# Altium PCB CD2840ADX-V21.PcbDoc (part 1 of 2)
Units mil, origin at the board's own origin, x right, y up, seen from the top; angles counter-clockwise.
Board outline 1576.8 x 1102.34 mil, 2 copper layers (Top Layer, Bottom Layer), stack 39.414 mil thick; 59 components, 48 nets, 199 pads, 466 vias.
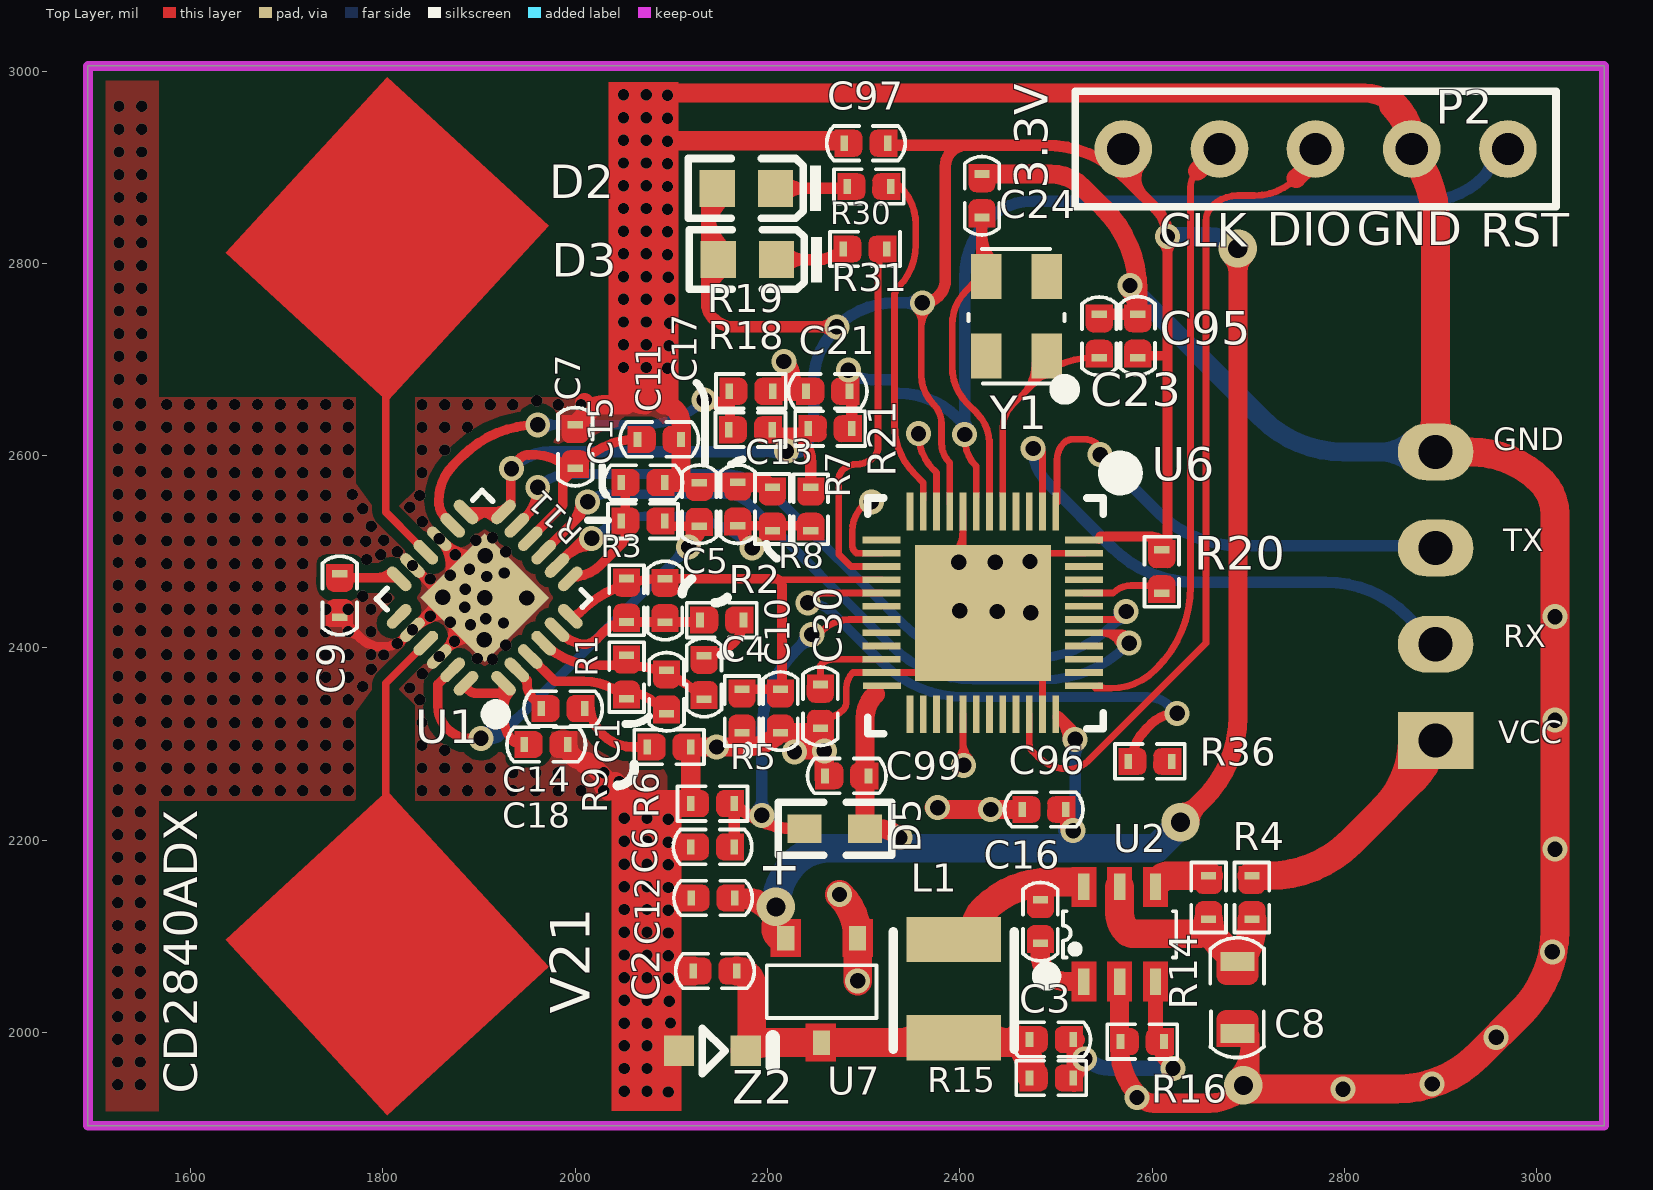
[diagram p0: Top Layer view]
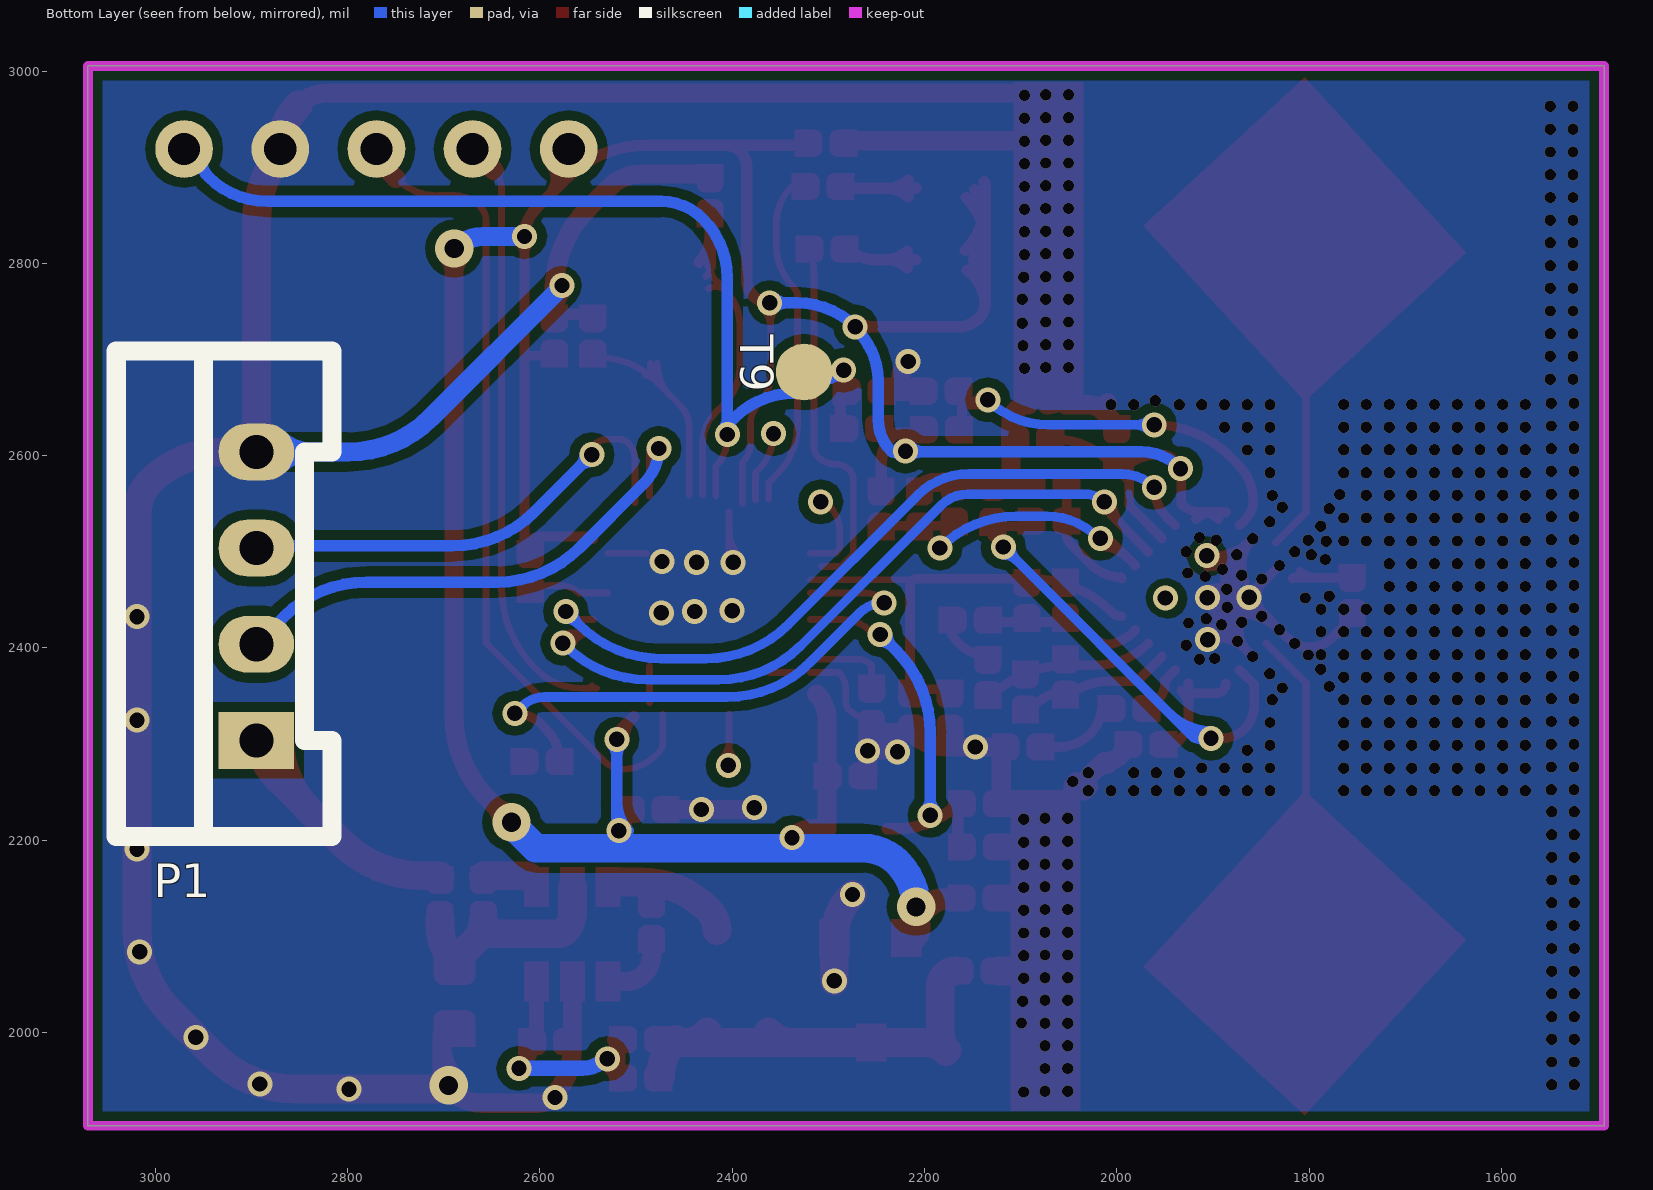
[diagram p1: Bottom Layer view, seen from below]

## Layer stack, top to bottom
Top Layer: signal copper 1.4
Dielectric: core 36.6142, FR-4, Dk 4.8
Bottom Layer: signal copper 1.4

## Board outline
1493.2,3005.34 3070,3005.34 3070,1903 1493.2,1903 1493.2,3005.34

## Design rules (kind name [scope] priority, off if disabled: settings)
Clearance [All] p1: gap=6
ComponentClearance [All] p1: gap=10 collisioncheckmode=3 verticalgap=10
PolygonConnect [All] p1: connectstyle=Direct reliefconductorwidth=10 reliefentries=4 polygonreliefangle="90 Angle"
RoutingVias [All] p1: holewidth=28 width=50 viastyle="Through Hole" minholewidth=15 minwidth=24 maxholewidth=28 maxwidth=50
SolderMaskExpansion [All] p1: expansion=4
TestPointUsage [All] p1: valid=0 allowmultiple=FALSE
Testpoint [All] p1: side=3 testpointundercomponent=TRUE minsize=40 maxsize=100 preferedsize=60 minholesize=0 maxholesize=40 preferedholesize=32 testpointgrid=1 style=297 order=0123456789
Width [All] p1: maxlimit=30 minlimit=7 preferedwidth=10
18 further rules are at their usual default settings.

## Components (designator, comment, footprint, x,y, rotation, side; value= is the part's Value field where it differs from the comment)
C1 "5nF/NA-FSK" C0402#1 2095,2377 r270 top (schematic designator C16)
C2 "10uF" C0402#1 2168,2064 r180 top (schematic designator C16)
C3 "22pF" C0402#1 2517.75,1992.75 r180 top (schematic designator C16)
C4 "10uF" C0402#1 2134,2392 r270 top (schematic designator C16)
C5 "5nF/NA-FSK" C0402#1 2093.39,2472 r270 top (schematic designator C16)
C6 "0.1uF" C0402#1 2165.47,2193.1 r180 top (schematic designator C16)
C7 "100nF" C0402#1 2000,2632 r270 top (schematic designator C16)
C8 "10uF/16V" C0603 2688.75,2073.05 r270 top
C9 "10uF" C0402#1 1755,2432 r90 top (schematic designator C16)
C10 "0.1uF/NA-FSK" C0402#1 2213.39,2357 r270 top
C11 "10uF" C0402#1 2110,2617 r180 top (schematic designator C16)
C12 "10uF" C0402#1 2166,2140 r180 top (schematic designator C16)
C13 "10uF" C0402#1 2169,2527 r90 top (schematic designator C16)
C14 "10uF" C0402#1 2010,2337 r180 top (schematic designator C16)
C15 "10uF" C0402#1 2048,2572 r0 top (schematic designator C16)
C16 "0.1uF" C0402#1 2483.75,2138.05 r270 top
C17 "10uF" C0402#1 2129,2572 r270 top (schematic designator C16)
C18 "10uF/NA-FSK" C0402#1 1992.39,2299.61 r180 top (schematic designator C16)
C21 "100nF" C0402#2 2240,2667 r0 top
C23 "12pF" C0402#2 2545,2747 r270 top
C24 "12pF" C0402#2 2423,2893 r270 top
C30 "100nF" C0402#2 2255,2362 r270 top
C95 "10uF/6.3V" C0402#2 2585,2702 r90 top
C96 "0.1uF/50V" C0402#2 2510,2232 r180 top
C97 "0.1uF/50V" C0402#2 2325,2925 r180 top
C99 "0.1uF/50V" C0402#2 2305,2267 r180 top
D2 "红灯" LC-0603_LED_S1 2178,2878 r180 top
D3 "绿灯" LC-0603_LED_S1 2179,2804 r180 top
D5 "PT19-21C" LED-0603 2270,2212 r0 top
L1 "PRS3015-100MT" PRS3015 2393.75,2100.75 r270 top
P1 "SWD" XH2.54mm 2894.85,2301.42 r270 bottom locked
P2 "DIP1X5-2.54" DIP1X5-2.54 2570,2919 r0 top
R1 "750k" R0402#1 2053.39,2347 r90 top (schematic designator R14)
R2 "20k" R0402#1 2175,2429 r180 top (schematic designator R14)
R3 "100K-NA" R0402#1 2053.39,2427 r90 top (schematic designator R14)
R4 "5.6" R0402#1 2703.75,2163.05 r270 top (schematic designator R14)
R5 "47k/NA-FSK" R0402#1 2173.39,2357 r270 top (schematic designator R14)
R6 "47k" R0402#1 2165.47,2238.1 r180 top (schematic designator R14)
R7 "12K" R0402#1 2245,2567 r270 top (schematic designator R14)
R8 "10k" R0402#1 2205,2522 r90 top (schematic designator R14)
R9 "18K" R0402#1 2075,2297 r0 top (schematic designator R14)
R11 "10k/NA-FSK" R0402#1 2093,2532 r180 top (schematic designator R14)
R14 "47k" R0402#1 2658.75,2163.05 r270 top
R15 "25.5k" R0402#1 2517.75,1952.75 r180 top
R16 "5.1k" R0402#1 2567.09,1990.55 r0 top
R18 "10k/NA-FSK" R0402#1 2205,2627 r180 top (schematic designator R14)
R19 "10k/NA-FSK" R0402#1 2160,2667 r0 top (schematic designator R14)
R20 "4.7K" R0402#2 2610,2502 r270 top
R21 "4.7KΩ" R0402#2 2287.8,2628.14 r180 top
R30 "1KΩ" R0402#2 2328,2880 r180 top
R31 "1KΩ" R0402#2 2324,2815 r180 top
R36 "100R" R0402#2 2575,2282 r0 top
T9 "" TestPoints 2330,2692 r270 bottom
U1 "XBR8161" QFN24 1855.75,2513.6 r135 top (schematic designator QFN-1)
U2 "SY8120B1ABC" SOT-23-6 2528.75,2053.05 r90 top
U6 "HC32F460JEUA-QFN48TR" QFN48-5X5mm 2424,2541 r270 top
U7 "ME6216A33M3G" SOT-23-L 2293.75,2098.05 r270 top (schematic designator U6)
Y1 "8MHZ-1C208000CE0R" OSC-SMD_3225 2459,2745 r90 top
Z2 "ESD5Z5.0T1G" SOD323 2189,1981 r180 top

## Footprints (in the part's own frame and the unit in brackets; to place one, negate y for a bottom-side part, rotate by r counter-clockwise, add the part's x,y. Pads: shape width x height; smd on the part's side, far side on the other; paste and mask are expansions set on the pad)
C0402#1 [mm]
  rect 0.2x0.4 smd: 1(0,0) 2(1.15,0)
  Top Layer region: 0.873,0.352 0.873,-0.351 1.401,-0.351 1.401,0.352
  Top Layer region: 1.402,-0.352 1.402,0.351 0.874,0.351 0.797,0.336 0.732,0.292 0.689,0.227 0.673,0.151 0.673,0.151 0.673,-0.152 0.689,-0.228 0.732,-0.293 0.797,-0.337 0.874,-0.352 0.874,-0.352
  Top Layer region: -0.252,0.352 -0.252,-0.351 0.276,-0.351 0.353,-0.336 0.418,-0.292 0.461,-0.227 0.477,-0.151 0.477,-0.151 0.477,0.152 0.461,0.228 0.418,0.293 0.353,0.337 0.276,0.352 0.276,0.352
  silkscreen extent -0.46,-0.46 1.61,0.46, body extent 0.08,-0.3 1.08,0.3, height 0.2
C0402#2 [mm]
  rect 0.2x0.4 smd: 1(0,0) 2(1.15,0)
  Top Layer region: 1.402,-0.352 1.402,0.351 0.874,0.355 0.796,0.34 0.729,0.295 0.685,0.229 0.669,0.151 0.673,0.151 0.669,-0.152 0.685,-0.23 0.729,-0.296 0.796,-0.34 0.874,-0.356 0.874,-0.352
  Top Layer region: -0.252,0.352 -0.252,-0.351 0.276,-0.355 0.354,-0.34 0.421,-0.295 0.465,-0.229 0.481,-0.151 0.477,-0.151 0.481,0.152 0.465,0.23 0.421,0.296 0.354,0.34 0.276,0.356 0.276,0.352
  silkscreen extent -0.46,-0.46 1.61,0.46, body extent 0.08,-0.3 1.08,0.3, height 0.2
C0603 [mil]
  rect 19.8x35.55 smd mask+0: 1(-0.92,0) 2(74,0)
  Top Layer region: 13.34,-21.73 14.89,-21.61 16.39,-21.25 17.82,-20.66 19.14,-19.85 20.32,-18.84 21.33,-17.66 22.14,-16.34 22.73,-14.91 23.09,-13.4 23.21,-11.86 23.18,-11.86 23.21,11.88 23.09,13.43 22.73,14.93 22.14,16.36 21.33,17.68 20.32,18.86 19.14,19.87 17.82,20.68 16.39,21.27 14.89,21.63 13.34,21.75 13.34,21.72 -14.73,21.72 -14.73,-21.7
  Top Layer region: 59.72,-21.73 58.17,-21.61 56.67,-21.25 55.24,-20.66 53.92,-19.85 52.74,-18.84 51.73,-17.66 50.92,-16.34 50.33,-14.91 49.97,-13.4 49.85,-11.86 49.88,-11.86 49.85,11.88 49.97,13.43 50.33,14.93 50.92,16.36 51.73,17.68 52.74,18.86 53.92,19.87 55.24,20.68 56.67,21.27 58.17,21.63 59.72,21.75 59.72,21.72 87.79,21.72 87.79,-21.7
  silkscreen extent -25,-28 99,28, body extent 6,-15 68,16, height 12
DIP1X5-2.54 [mil]
  round 60 hole 33.46: 1(0,0) 2(100,0) 3(200,0) 4(300,0) 5(400,0)
  silkscreen extent -50,-60 450,60
LC-0603_LED_S1 [mm]
  rect 0.93x0.98 smd: A(0.77,0) K(-0.77,0)
  silkscreen extent -1.97,-0.79 1.54,0.79, body extent -0.8,-0.4 0.8,0.4, height 0.6
LED-0603 [mm]
  rect 0.9x0.762 smd: 1(-0.8,0) 2(0.8,0)
  silkscreen extent -1.5,-0.7 1.5,0.7
OSC-SMD_3225 [mm] "OSC-SMD-3225"
  rect 1.2x0.8 smd: 1(-1.05,-0.8) 2(1.05,-0.8) 3(1.05,0.8) 4(-1.05,0.8)
  silkscreen extent -1.98,-1.37 1.78,1.27
PRS3015 [mm]
  rect 1.2x2.5 smd: 1(0.1,0) 2(2.7,0)
  silkscreen extent -0.1,-1.6 3,1.6, body extent -0.1,-1.5 2.9,1.5, height 1.5
QFN24 [mm]
  oval 0.8x0.3 smd: 1(-3.95,1.45) 2(-3.95,0.95) 3(-3.95,0.45) 4(-3.95,-0.05) 5(-3.95,-0.55) 6(-3.95,-1.05) 13(-0.05,-1.05) 14(-0.05,-0.55) 15(-0.05,-0.05) 16(-0.05,0.45) 17(-0.05,0.95) 18(-0.05,1.45)
  oval 0.3x0.8 smd: 7(-3.25,-1.75) 8(-2.75,-1.75) 9(-2.25,-1.75) 10(-1.75,-1.75) 11(-1.25,-1.75) 12(-0.75,-1.75) 19(-0.75,2.15) 20(-1.25,2.15) 21(-1.75,2.15) 22(-2.25,2.15) 23(-2.75,2.15) 24(-3.25,2.15)
  rect 2.4x2.4 smd: 25(-2,0.2)
  silkscreen extent -4.59,-1.75 0.05,2.37
QFN48-5X5mm [mm] "QFN48-5X5mm"
  rect 1x0.18 smd: 1(-0.02,1.925) 2(-0.02,1.575) 3(-0.02,1.225) 4(-0.02,0.875) 5(-0.02,0.525) 6(-0.02,0.175) 7(-0.02,-0.175) 8(-0.02,-0.525) 9(-0.02,-0.875) 10(-0.02,-1.225) 11(-0.02,-1.575) 12(-0.02,-1.925) 25(5.33,-1.925) 26(5.33,-1.575) 27(5.33,-1.225) 28(5.33,-0.875) 29(5.33,-0.525) 30(5.33,-0.175) 31(5.33,0.175) 32(5.33,0.525) 33(5.33,0.875) 34(5.33,1.225) 35(5.33,1.575) 36(5.33,1.925)
  rect 0.18x1 smd: 13(0.73,-2.675) 14(1.08,-2.675) 15(1.43,-2.675) 16(1.78,-2.675) 17(2.13,-2.675) 18(2.48,-2.675) 19(2.83,-2.675) 20(3.18,-2.675) 21(3.53,-2.675) 22(3.88,-2.675) 23(4.23,-2.675) 24(4.58,-2.667) 37(4.58,2.675) 38(4.23,2.675) 39(3.88,2.675) 40(3.53,2.675) 41(3.18,2.675) 42(2.83,2.675) 43(2.48,2.675) 44(2.13,2.675) 45(1.78,2.675) 46(1.43,2.675) 47(1.08,2.675) 48(0.73,2.675)
  rect 3.6x3.6 smd: 49(2.655,0)
  silkscreen extent -1.07,-3.05 5.84,3.7
R0402#1 [mm]
  rect 0.2x0.4 smd: 1(0,0) 2(1.15,0)
  Top Layer region: 0.873,0.352 0.873,-0.351 1.401,-0.351 1.401,0.352
  Top Layer region: 1.402,-0.352 1.402,0.351 0.874,0.351 0.797,0.336 0.732,0.292 0.689,0.227 0.673,0.151 0.673,0.151 0.673,-0.152 0.689,-0.228 0.732,-0.293 0.797,-0.337 0.874,-0.352 0.874,-0.352
  Top Layer region: -0.252,0.352 -0.252,-0.351 0.276,-0.351 0.353,-0.336 0.418,-0.292 0.461,-0.227 0.477,-0.151 0.477,-0.151 0.477,0.152 0.461,0.228 0.418,0.293 0.353,0.337 0.276,0.352 0.276,0.352
  silkscreen extent -0.35,-0.46 1.5,0.46, body extent 0.12,-0.26 1.12,0.24, height 0.35
R0402#2 [mm]
  rect 0.2x0.4 smd: 1(0,0) 2(1.15,0)
  Top Layer region: -0.252,0.352 -0.252,-0.351 0.276,-0.355 0.354,-0.34 0.421,-0.295 0.465,-0.229 0.481,-0.151 0.477,-0.151 0.481,0.152 0.465,0.23 0.421,0.296 0.354,0.34 0.276,0.356 0.276,0.352
  Top Layer region: 1.402,-0.352 1.402,0.351 0.874,0.355 0.796,0.34 0.729,0.295 0.685,0.229 0.669,0.151 0.673,0.151 0.669,-0.152 0.685,-0.23 0.729,-0.296 0.796,-0.34 0.874,-0.356 0.874,-0.352
  silkscreen extent -0.35,-0.46 1.5,0.46, body extent 0.12,-0.26 1.12,0.24, height 0.35
SOD323 [mm]
  rect 0.8x0.8 smd: A(2.06,0) K(0.3,0)
  silkscreen extent 0.84,-0.6 1.44,0.6, body extent -0.17,-0.62 2.53,0.63, height 1.1
SOT-23-6 [mm]
  rect 0.7x0.3 smd: 1(0,0) 2(0,-0.95) 3(0,-1.9) 4(2.5,-1.9) 5(2.5,-0.95) 6(2.5,0)
  Top Layer region: 1.972,-2.226 3.025,-2.226 3.025,-1.573 1.972,-1.573
  Top Layer region: 1.972,-0.335 3.025,-0.335 3.025,0.318 1.972,0.318
  Top Layer region: -0.527,-2.226 0.526,-2.226 0.526,-1.573 -0.527,-1.573
  Top Layer region: -0.527,-1.276 0.526,-1.276 0.526,-0.623 -0.527,-0.623
  Top Layer region: -0.527,-0.335 0.526,-0.335 0.526,0.318 -0.527,0.318
  Top Layer region: 1.972,-1.276 3.025,-1.276 3.025,-0.623 1.972,-0.623
  silkscreen extent 0.63,-2.45 1.86,0.54, body extent -0.16,-2.39 2.64,0.51, height 1.45
SOT-23-L [mm]
  rect 0.65x0.45 smd: 1(0,0) 2(0,-1.9) 3(2.757,-0.95)
  Top Layer region: -0.507,-0.398 0.496,-0.398 0.496,0.405 -0.507,0.405
  Top Layer region: -0.507,-2.303 0.496,-2.303 0.496,-1.5 -0.507,-1.5
  Top Layer region: 2.254,-1.374 3.257,-1.374 3.257,-0.571 2.254,-0.571
  silkscreen extent 0.71,-2.4 2.11,0.5, body extent 0.17,-2.44 2.67,0.56, height 1.05
TestPoints [mil] "TestPoints"
  round 59.06 smd: 1(5,5)
XH2.54mm [mm]
  rect 1.5x2 hole 0.9: 1(-0.064,0)
  oval 1.5x2 hole 0.9: 2(-2.603,0) 3(-5.144,0) 4(-7.683,0)
  silkscreen extent -10.35,-3.7 2.48,2

## Part data
C1 C2 C3 C4 C5 C6 C7 C8 C9 C10 C11 C12 C13 C14 C15 C16 C17 C18 C30: library part Cap, "Capacitor"
C21: library part "0402 100nF (104) 10% 16V", "贴片电容"
C23 C24: library part "0402 22pF (220) 5% 50V", "贴片电容"
C95 C96 C97 C99: library part "0402 2.2nF (222) 10% 50V", "贴片电容"
D2 D3: library part "0603 红灯", "发光二极管"
D5: library part "Photo Sen", "Photosensitive Diode"
L1: library part Inductor, "Inductor"
P1: library part "Header 3", "Header, 3-Pin"
P2: library part DIP1X6-2.54mm
R1 R2 R3 R4 R5 R6 R7 R8 R9 R11 R14 R15 R16 R18 R19 R20: library part Res2, "Resistor"
R21 R36: library part "0402 4.7KΩ (4701) 1%", "贴片电阻"
R30 R31: library part "0402 1KΩ (1001) 1%", "贴片电阻"
T9: library part TestPoints, "TestPoints"
U1: library part XBR1000
U2: library part H9108
U6: library part HC32F460JETA-LQFP48
U7: library part SSP6206
Y1: library part "SMD-3225_4P  25MHZ 12PF 10PPM", "贴片晶振"
Z2: library part "D Zener", "Zener Diode"

## Via types
v1: diameter 11.81, hole 11.81, Top Layer to Bottom Layer, tented both sides, 403 vias
v2: diameter 26, hole 16, Top Layer to Bottom Layer, tented both sides, 59 vias
v3: diameter 40, hole 20, Top Layer to Bottom Layer, tented both sides, 4 vias

## Nets (pads, with @x,y where several pads share a name; then routed paths per layer and width w, separated by ;. In a path a pad name is that pad's centre, name@x,y a point inside that pad or via, vN(x,y) a via of type N, cw(c..) or ccw(c..) an arc to the next point about the centre after c; other vN are vias at no path point)
3.3V: C7.2 C11.2 C12.1 C95.1 C96.1 C97.1 C99.1 D2.A D3.A D5.2 P2.1 R7.1 R18.1 R20.1 R21.2 U1.10 U1.12 U1.13 U6.9 U6.24 U6.36 U6.48 U7.2 | length 5613.4
  Top Layer w7: v2@2360,2759 2360,2683.97 ccw(c2403.38,2683.97) 2372.71,2653.29 cw(c2352.69,2633.27) 2381,2633.27 2381,2613.09 ccw(c2410.19,2613.09) 2389.55,2592.45 U6.9@2389.55,2550 ; v2@2354.28,2752.28 cw(c2340.48,2738.48) 2360,2738.48 ; v2@2354.28,2752.28 cw(c2340.48,2738.48) 2360,2738.48 ; v2@2354.28,2752.28 cw(c2340.48,2738.48) 2360,2738.48 ; 2360,2733.65 cw(c2386.35,2733.65) v2@2367.72,2752.28 ; 2360,2733.65 cw(c2386.35,2733.65) v2@2367.72,2752.28 ; 2360,2733.65 cw(c2386.35,2733.65) v2@2367.72,2752.28
  Top Layer w10: U1.13@1886.38,2541.44 1913.75,2541.44 ccw(c1913.75,2567.25) 1932,2549 ccw(c1929.59,2551.41) 1933,2551.41 v2@1933,2575.27 ; 1951.66,2601 ccw(c1951.66,2587.34) 1942,2597 ccw(c1963.73,2575.27) v2@1933,2575.27 ; 1951.68,2600.78 cw(c1956.59,2546.89) C7.2@1994.85,2585.15 ; U1.10@1953.19,2513.6 cw(c1954.61,2513.6) 1953.61,2514.61 1985.38,2546.38 ; 1985.37,2546.37 ccw(c1981.45,2550.3) 1987,2550.3 1987,2590 ; 1987,2574 ccw(c1987,2574.67) 1987.47,2574.19 2005.92,2592.64 cw(c2064.72,2533.83) C11.2@2064.72,2617 ; U6.48@2544.43,2513.29 cw(c2550.97,2506.75) 2550.97,2516 ; 2546,2516 2600.18,2516 cw(c2600.18,2502.08) 2610,2511.94 ; R20.1@2616,2501 v2(2616,2828) ; 2616,2704 C95.1@2589.83,2704 ; v2@1933,2573.69 cw(c1952.31,2573.69) 1938.66,2587.34 ccw(c1952.31,2573.69) v2@1933,2573.69 ; v2@1933,2573.69 ccw(c1913.69,2573.69) 1927.34,2587.34 cw(c1913.69,2573.69) v2@1933,2573.69 ; v2@1933,2575.27 cw(c1948.64,2575.27) 1938.29,2587 ccw(c1948.64,2575.27) v2@1933,2575.27 ; v2@1933,2575.27 ccw(c1917.36,2575.27) 1927.71,2587 cw(c1917.36,2575.27) v2@1933,2575.27 ; 1995.09,2581.82 ccw(c1990.19,2586.72) C7.2@1997.13,2586.72 ; 1995.09,2581.82 ccw(c1990.19,2586.72) C7.2@1997.13,2586.72 ; 1995.09,2581.82 ccw(c1990.19,2586.72) C7.2@1997.13,2586.72 ; C7.2@2002.87,2586.72 cw(c2009.81,2586.72) 2004.91,2591.63 ; C7.2@2002.87,2586.72 cw(c2009.81,2586.72) 2004.91,2591.63 ; C7.2@2002.87,2586.72 cw(c2009.81,2586.72) 2004.91,2591.63 ; C95.1@2589.83,2704 ccw(c2589.83,2697.17) C95.1@2585,2702 cw(c2589.83,2697.17) C95.1@2589.83,2704 ; 2616,2808.69 cw(c2635.31,2808.69) 2621.66,2822.34 ccw(c2635.31,2808.69) 2616,2808.69 ; 2616,2808.69 ccw(c2596.69,2808.69) 2610.34,2822.34 cw(c2596.69,2808.69) 2616,2808.69 ; U1.13@1886.9,2540.91 cw(c1888.18,2539.63) 1888.18,2541.44 ccw(c1888.18,2539.63) U1.13@1886.9,2540.91 ; U1.13@1893.98,2533.84 cw(c1912.32,2515.49) 1912.32,2541.44 ccw(c1912.32,2515.49) U1.13@1893.98,2533.84 ; 1899.4,2541.44 cw(c1899.4,2515.49) 1917.75,2533.84 ccw(c1899.4,2515.49) 1899.4,2541.44
  Top Layer w12: 2136.75,2756.93 cw(c2180.37,2756.93) D3.A@2155.66,2792.87 ; 2136.75,2779.74 cw(c2164.68,2779.74) D3.A@2148.86,2802.76 ; D3.A@2136.75,2820.9 cw(c2203.8,2820.9) D2.A@2156.39,2868.31 ; 2136.75,2834.54 ccw(c2178.24,2834.54) D3.A@2148.9,2805.2 ; 2136.75,2849.88 cw(c2174.83,2849.88) D2.A@2147.9,2876.8 ; D2.A@2136.75,2863.51 ccw(c2207.21,2863.51) D3.A@2157.39,2813.69 ; D2.A@2138,2884.75 ccw(c2141.02,2881.73) 2136.75,2881.73 2136.75,2758.5 ccw(c2159.09,2758.5) 2143.29,2742.71 ccw(c2145,2744.41) 2145,2742 ccw(c2164.31,2761.31) 2164.31,2734 v2(2272,2734) ; 2200,2623.14 2234.72,2623.14 ; v2@2215.21,2610.08 ccw(c2204.11,2623.14) 2221.25,2623.14 2221.25,2608.37 cw(c2216.13,2608.37) v2@2219.75,2604.75 ; 2221.25,2618.03 ccw(c2233.03,2618.03) v2@2224.7,2609.7 ; 2232.79,2621.21 cw(c2203.32,2591.73) 2245,2591.73 R7.1@2245,2567 ; C97.1@2325,2925 ccw(c2329.83,2929.83) 2329.83,2923 2488,2923 cw(c2488,2802.29) 2573.36,2887.64 2603.98,2857.02 cw(c2574.96,2828) v2(2616,2828) ; v2(2361,2759) ccw(c2361,2783) 2385,2783 2385,2901 cw(c2407,2901) 2407,2923 ; U6.36@2502.55,2328.39 2515.8,2315.15 cw(c2505.65,2305) v2(2520,2305) ; v2@2510,2212.24 C96.1@2510,2232 ccw(c2526.74,2232) v2@2520.54,2216.45 ; P2.1@2579.23,2911.34 ccw(c2596.96,2896.62) 2580.67,2880.33 ; P2.1@2588.47,2903.67 ccw(c2607.13,2888.18) 2589.98,2871.02 ; 2255.1,2734 cw(c2255.1,2717.1) v2@2267.05,2729.05 ; 2255.1,2734 ccw(c2255.1,2750.9) v2@2267.05,2738.95 ; 2255.1,2734 cw(c2255.1,2717.1) v2@2267.05,2729.05 ; 2255.1,2734 ccw(c2255.1,2750.9) v2@2267.05,2738.95 ; 2255.1,2734 cw(c2255.1,2717.1) v2@2267.05,2729.05 ; 2255.1,2734 ccw(c2255.1,2750.9) v2@2267.05,2738.95 ; 2503.85,2327.1 cw(c2481.75,2305) 2513,2305 ccw(c2481.75,2305) 2503.85,2327.1 ; C96.1@2510,2229.14 ccw(c2537.14,2229.14) v2(2517.95,2209.95) cw(c2537.14,2229.14) C96.1@2510,2229.14
  Top Layer w20: v3@2199.44,2127.1 ccw(c2180.53,2119.69) 2180.53,2140 ; v3@2201.26,2124.12 ccw(c2166,2092.91) C12.1@2166,2140 2180.53,2140 ; v3@2202.39,2123.03 cw(c2181.03,2097.13) U7.2@2214.6,2097.13 ; v3@2204.32,2121.78 cw(c2196.16,2105.24) U7.2@2214.6,2105.24 ; U7.2@2214.6,2097.64 2214.6,2105.92 ccw(c2208.75,2105.92) 2208.75,2111.78 ccw(c2180.53,2111.78) 2180.53,2140 ; 2312,2352 ccw(c2337.36,2326.64) 2301.5,2326.64 D5.2@2301.5,2212 2315.42,2212 cw(c2315.42,2180.42) v2@2337.75,2202.75 ; v3(2629.5,2218.75) 2653.89,2243.14 ccw(c2568.54,2328.5) 2689.25,2328.5 v3@2689.25,2811.75 ; v3@2629.5,2228.75 ccw(c2629.5,2252.89) 2646.57,2235.82 ccw(c2663.64,2218.75) v3@2639.5,2218.75 ; v3@2681.93,2808.43 cw(c2664.25,2790.75) 2689.25,2790.75 ; 2689.25,2791.96 cw(c2712.54,2791.96) v3@2696.07,2808.43
  Top Layer w30: 2208.75,2107.32 ccw(c2217.36,2107.32) 2211.27,2101.23 ccw(c2218.95,2108.9) 2214.6,2098.96 ccw(c2218.95,2108.9) U7.2@2218.95,2098.05 ; v3@2208.75,2111.78 ccw(c2228.74,2111.78) 2214.6,2097.64 cw(c2228.74,2111.78) v3@2208.75,2111.78
  Bottom Layer w12: v2@1934,2587.25 cw(c1974.44,2546.81) 1974.44,2604 2234.04,2604 ; 2201.04,2604 ccw(c2201.04,2623.46) v2@2214.8,2609.7 ; 2204.66,2604 cw(c2204.66,2589.66) v2@2214.8,2599.8 ; v2@2224.89,2600 cw(c2234.03,2591.55) 2234.03,2604 ; v2@2225.62,2608.57 ccw(c2234.03,2614.04) 2234.03,2604 ; v2(2361,2759) 2332.36,2759 ccw(c2332.36,2673.64) v2(2272,2734) cw(c2267.78,2734) 2270.76,2731.01 2269.64,2729.89 ccw(c2321.28,2678.25) 2248.25,2678.25 2248.25,2638.32 cw(c2199.72,2638.32) 2234.04,2604 ; v2@2513,2214.9 ccw(c2496.1,2231.8) 2520,2231.8 ; v2@2513.88,2204.25 cw(c2505.39,2192.37) 2520,2192.37 ; 2520,2192.49 v2(2520,2305) ; 2234,2604 cw(c2234.75,2614.54) 2225.88,2608.8 ccw(c2234.75,2614.54) 2234,2604 ; 2234,2604 ccw(c2233.25,2593.46) 2225.28,2600.4 cw(c2233.25,2593.46) 2234,2604 ; 2234.04,2604 cw(c2234.04,2613.31) 2226.02,2608.57 ccw(c2234.04,2613.31) 2234.04,2604 ; 2234.03,2604 ccw(c2234.03,2591.59) 2225.06,2600.16 cw(c2234.03,2591.59) 2234.03,2604 ; 2344.1,2759 cw(c2344.1,2742.1) v2@2356.05,2754.05 ; 2344.1,2759 ccw(c2344.1,2775.9) v2@2356.05,2763.95 ; 2344.1,2759 cw(c2344.1,2742.1) v2@2356.05,2754.05 ; 2344.1,2759 ccw(c2344.1,2775.9) v2@2356.05,2763.95 ; 2344.1,2759 cw(c2344.1,2742.1) v2@2356.05,2754.05 ; 2344.1,2759 ccw(c2344.1,2775.9) v2@2356.05,2763.95 ; v2@2515.05,2300.05 cw(c2503.1,2288.1) 2520,2288.1 ; v2@2515.05,2300.05 cw(c2503.1,2288.1) 2520,2288.1 ; v2@2515.05,2300.05 cw(c2503.1,2288.1) 2520,2288.1 ; 2520,2288.1 cw(c2536.9,2288.1) v2@2524.95,2300.05 ; 2520,2288.1 cw(c2536.9,2288.1) v2@2524.95,2300.05 ; 2520,2288.1 cw(c2536.9,2288.1) v2@2524.95,2300.05 ; 2200.69,2604 ccw(c2200.69,2624.31) 2215.05,2609.95 cw(c2200.69,2624.31) 2200.69,2604 ; 2205.51,2604 cw(c2205.51,2590.51) 2215.05,2600.05 ccw(c2205.51,2590.51) 2205.51,2604 ; v2@2508.05,2209.95 ccw(c2479.2,2238.8) 2520,2238.8 cw(c2479.2,2238.8) v2@2508.05,2209.95
  Bottom Layer w20: v2(2616,2828) 2658.82,2828 cw(c2658.82,2785.32) v3(2689,2815.5)
  Bottom Layer w30: v3(2208.75,2130.75) cw(c2273.93,2130.75) 2227.84,2176.84 cw(c2263.83,2140.85) 2263.83,2191.75 2604.5,2191.75 v3@2628.75,2216
  other v2: 2337.75,2202.75 1933.75,2586.5 2219.75,2604.75
3.6V: C2.1 C3.2 L1.2 R15.2 U7.3 Z2.K | length 620.7
  Top Layer w30: C2.1@2168,2064 cw(c2168,2048.5) 2183.5,2048.5 2183.5,1988.5 cw(c2184.51,1988.5) 2184.51,1989.51 2450.92,1989.51 ; Z2.K@2176.66,1981.53 ccw(c2160.15,1998.04) 2183.5,1998.04 ; Z2.K@2177.72,1980.47 cw(c2199.53,1958.66) 2199.53,1989.51 ; L1.2@2425.6,2000.39 ccw(c2450.92,2024.41) 2450.92,1989.51 ; R15.2@2474.56,1954.58 ccw(c2420.58,1954.58) 2458.75,1992.75 cw(c2450.92,2000.58) 2450.92,1989.51 ; 2335.41,1989.51 ccw(c2335.41,2027.2) L1.2@2362.06,2000.55 ; 2335.41,1989.51 ccw(c2335.41,2027.2) L1.2@2362.06,2000.55 ; 2335.41,1989.51 ccw(c2335.41,2027.2) L1.2@2362.06,2000.55 ; L1.2@2425.54,2000.44 ccw(c2451.3,2025.31) 2451.3,1989.51 cw(c2451.3,2025.31) L1.2@2425.54,2000.44
5-15V: P1.1 R4.1 | length 337.4
  Top Layer w30: R4.1@2703.75,2163.05 2721.55,2163.05 ccw(c2721.55,2283.76) 2806.9,2198.4 2871.77,2263.27 ccw(c2823.55,2311.5) P1.1@2891.75,2311.5 ; 2840.83,2232.33 ccw(c2769.24,2303.92) P1.1@2870.48,2303.92
ADC1: U6.10 | length 83.5
  Top Layer w7: v2@2360.48,2614.6 cw(c2368.88,2623) v2(2357,2623) ccw(c2410.11,2623) 2372.56,2585.44 2375.55,2582.45 ; U6.10@2375.77,2554 2375.77,2582.23
ADC2: U6.14 | length 90.1
  Top Layer w7: v2(2308,2552) ccw(c2308,2539.93) 2299.46,2548.46 2299.19,2548.19 ccw(c2326.21,2521.17) 2288,2521.17 2288,2507.24 ccw(c2298.24,2507.24) 2291,2500 2291.92,2499.08 ccw(c2292.73,2499.89) 2292.73,2498.74 2292.77,2498.7 ccw(c2293.31,2499.23) 2293.31,2498.48 U6.14@2318.68,2498.48
ADC3: U6.18
FSK_PWM: U1.9 U6.41 | length 859
  Top Layer w7: 2556.34,2415.8 cw(c2556.34,2397.13) v2@2573.68,2404.07 ; 2566.69,2415.8 cw(c2566.69,2401.27) v2@2580.18,2406.67 ; v2@2567.18,2401.47 ccw(c2546,2392.99) 2546,2415.8 2565.2,2415.8 v2@2577,2404
  Top Layer w10: U1.9@1967.11,2499.68 cw(c1968.14,2499.68) 1967.41,2500.41 2005.46,2538.46 ; 1995.1,2528.1 ccw(c1971.2,2552) 2005,2552 cw(c1971.2,2552) 1995.1,2528.1
  Bottom Layer w10: v2(2013,2552) ccw(c2013,2556.83) 2016.41,2553.41 cw(c2032.31,2537.51) 2032.31,2560 2155,2560 cw(c2155,2521.37) 2182.31,2548.69 2328.64,2402.36 ccw(c2414,2487.71) 2414,2367 2488,2367 ccw(c2488,2487.71) 2573.36,2402.36 v2(2576,2405)